# EAGLE board orion (EAGLE 7.7.0)
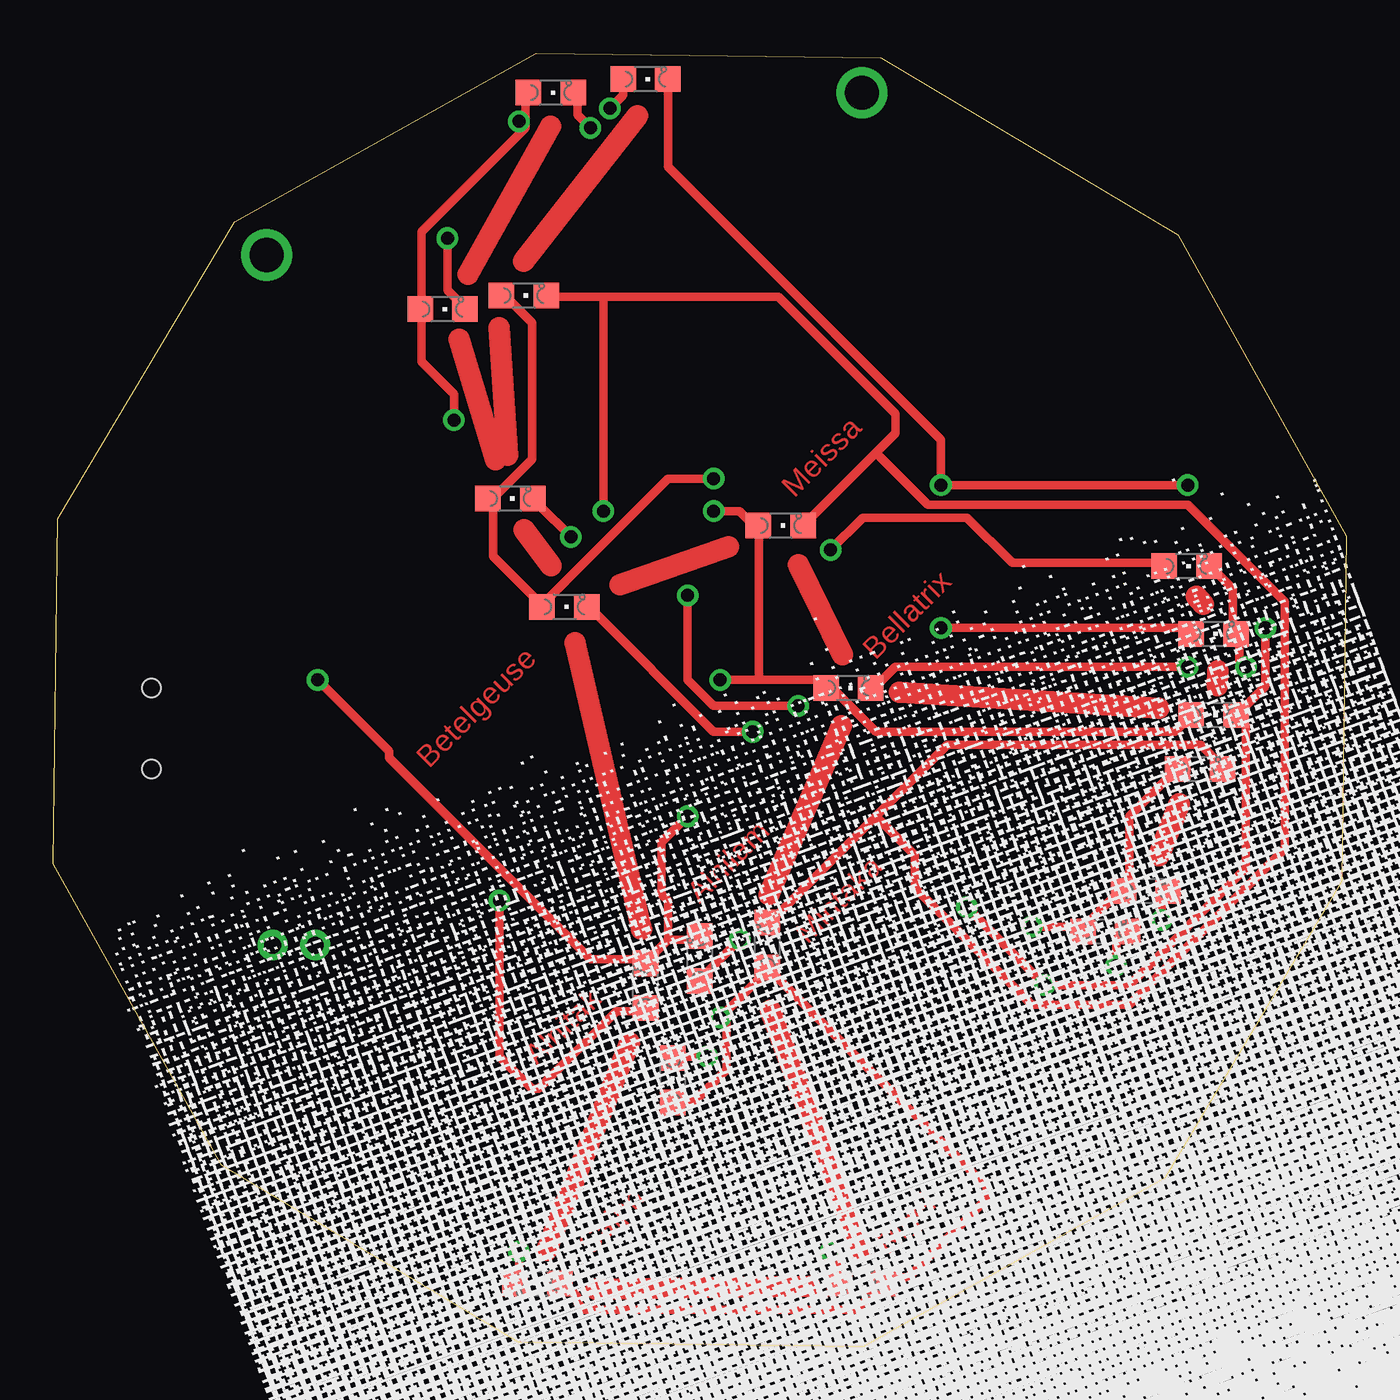
[diagram p0: board, top side]
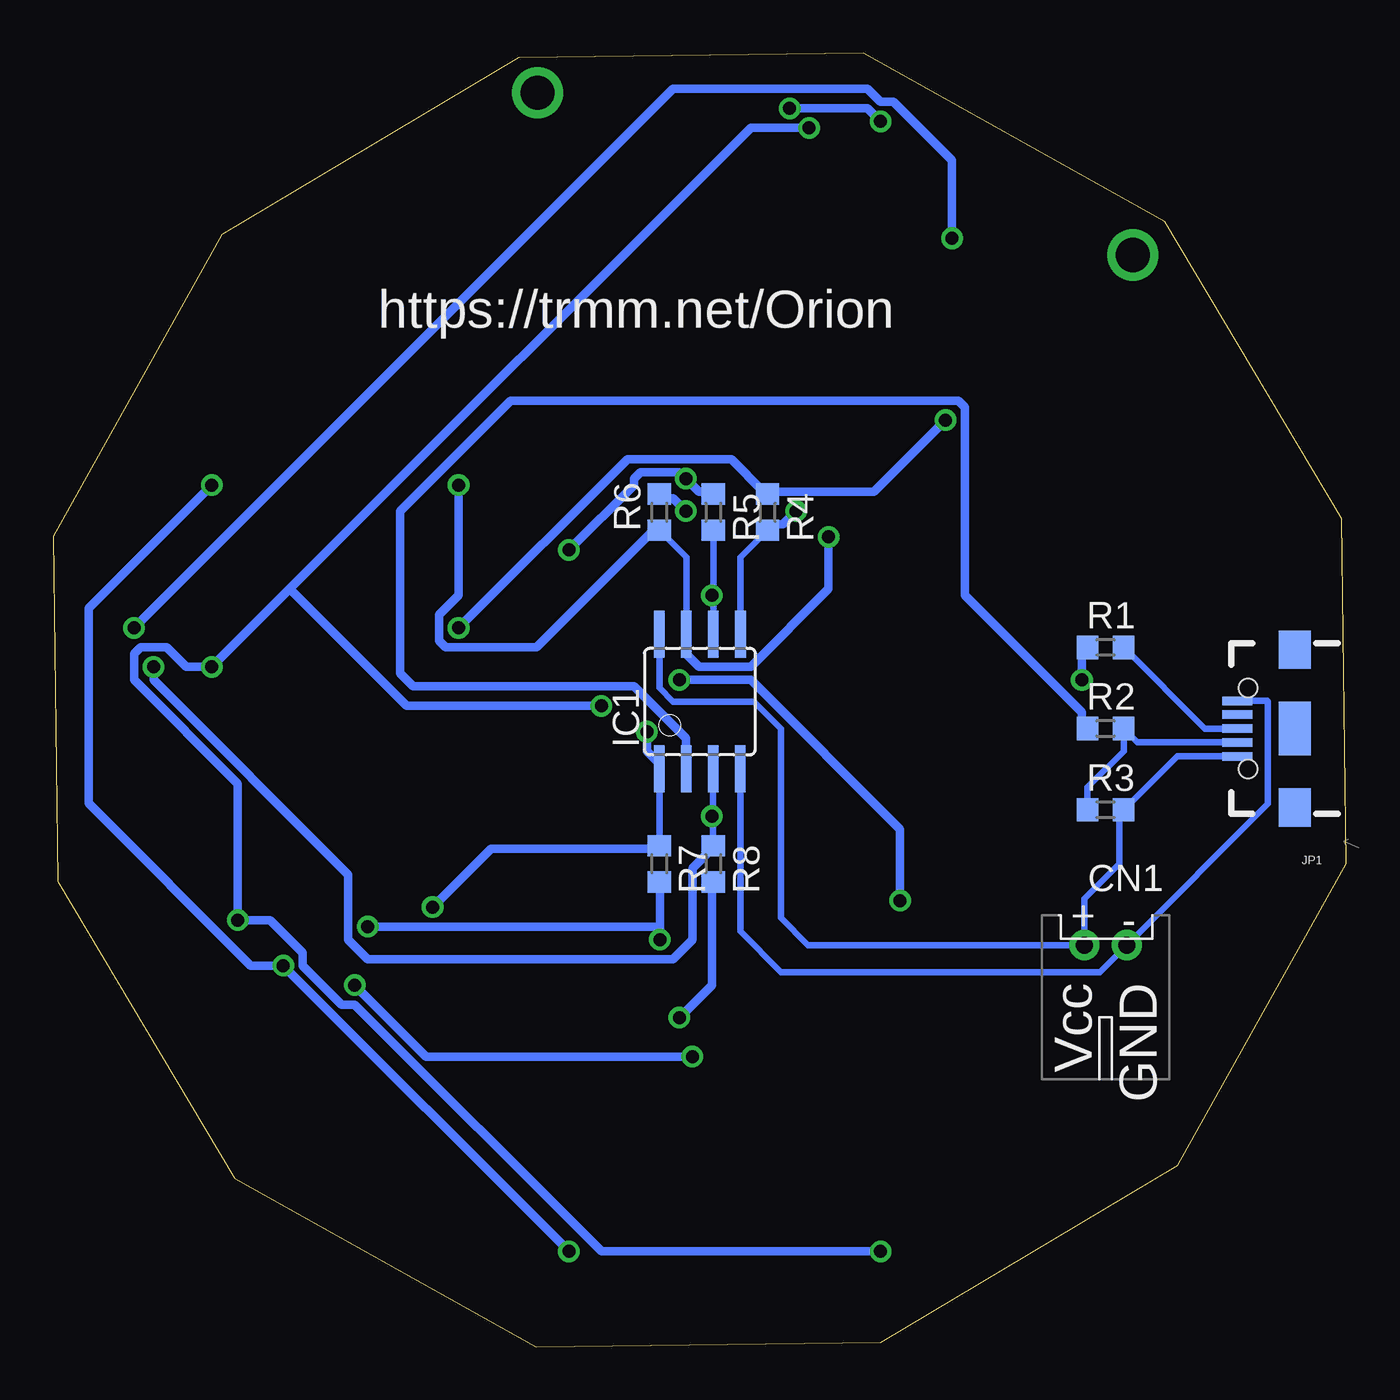
[diagram p1: board, bottom side, seen from below]

Size 60.71 x 60.71 mm. Coordinates in mm from the lower left corner, seen from the top.
Outline: 60.49,21.84 52.19,7.91 38.04,0 21.84,0.22 7.91,8.52 0,22.66 0.22,38.87 8.52,52.8 22.66,60.71 38.87,60.49 52.8,52.19 60.71,38.04 60.49,21.84
Copper layers (1*16): Top 0.035mm / dielectric 1.5mm / Bottom 0.035mm
Design rules "default": minimum track width 10mil, minimum drill 24mil, track to track 8mil, track to pad 8mil, pad to pad 8mil, via to via 8mil, smd to smd 8mil, copper to edge 40mil, drill to drill 8mil, minimum pad ring 10mil, minimum via ring 8mil, stop-mask expansion 4mil, vias tented up to drill 0mil, thermal gap 10mil
Net classes: 0 default: width 0.406 mm

## Footprints (pad centres in the part's own frame; a part is rotated, then mirrored left to right if it is on the bottom)
JST-PH-2-THM-RA = drill 0.8 pad 1.422: 1 1,0; 2 -1,0
CHIPLED_0805 = smd 1.2 x 1.2: A 0,-1.05; C 0,1.05
SOIC8 = smd 0.5 x 2.2: 1 -1.905,-3.154; 2 -0.645,-3.154; 3 0.625,-3.154; 4 1.895,-3.154; 5 1.905,3.154; 6 0.635,3.154; 7 -0.635,3.154; 8 -1.905,3.154
USB-B-MICRO-SMD_V03 = smd 1.4 x 0.4: D+1 2.7,0; D-1 2.7,0.65; GND1 2.7,-1.3; ID1 2.7,-0.65; VBUS1 2.7,1.3 | smd 1.5 x 1.8: SHIELD1 0,3.7; SHIELD2 0,-3.7 | smd 1.5 x 2.5: SHIELD3 0,0 | hole 0.85: 2.2,1.9; 2.2,-1.9
R0603 = smd 1 x 1.1: 1 -0.85,0; 2 0.85,0

## Placement (x,y rotation side)
CN1  [JST-PH-2-THM-RA]  11.3,18.85 180 bottom
D0  [CHIPLED_0805]  23.36,58.86 270 top
D1  [CHIPLED_0805]  27.81,59.49 270 top
D2  [CHIPLED_0805]  18.28,48.7 270 top
D3  [CHIPLED_0805]  22.09,49.33 270 top
D4  [CHIPLED_0805]  21.46,39.81 270 top
D5  [CHIPLED_0805]  24,34.73 270 top
D6  [CHIPLED_0805]  34.16,38.54 270 top
D7  [CHIPLED_0805]  37.33,30.92 270 top
D8  [CHIPLED_0805]  54.48,29.65 270 top
D9  [CHIPLED_0805]  53.84,27.11 270 top
D10  [CHIPLED_0805]  51.3,21.39 270 top
D11  [CHIPLED_0805]  49.4,19.49 270 top
D12  [CHIPLED_0805]  54.48,33.46 270 top
D13  [CHIPLED_0805]  53.21,36.63 270 top
D14  [CHIPLED_0805]  27.81,16.95 0 top
D15  [CHIPLED_0805]  30.35,18.22 0 top
D16  [CHIPLED_0805]  33.52,18.85 0 top
D17  [CHIPLED_0805]  22.73,2.98 90 top
D18  [CHIPLED_0805]  37.97,2.98 90 top
D19  [CHIPLED_0805]  29.08,12.5 0 top
IC1  TINY22S  [SOIC8]  30.35,30.28 0 bottom
JP1  USB_MICROB_PLUGCONN-11752  [USB-B-MICRO-SMD_V03]  2.41,29.01 180 bottom
R1  68  [R0603]  11.3,32.82 0 bottom
R2  68  [R0603]  11.3,29.01 0 bottom
R3  1.0k  [R0603]  11.3,25.2 0 bottom
R4  [R0603]  27.17,39.17 270 bottom
R5  [R0603]  29.71,39.17 270 bottom
R6  [R0603]  32.25,39.17 90 bottom
R7  [R0603]  32.25,22.66 270 bottom
R8  [R0603]  29.71,22.66 270 bottom

## Library data of the parts
CN1 = adafruit
D0 D1-D19 = led
IC1 = atmel; OC_FARNELL: unknown; OC_NEWARK: unknown
JP1 = SparkFun-Connectors; PROD_ID: CONN-11752
R1-R8 = resistor

## Nets
B0: D3.C D6.C D9.C D16.C IC1.5 R4.2
B1: D0.C D7.C D10.C D17.C IC1.6 R5.2
B2: D1.C D4.C D11.C D18.C IC1.7 R6.1
B3: D2.C D5.C D8.C D19.C IC1.1 R7.1
B4: D12.C D13.C D14.C D15.C IC1.3 R1.1 R8.1
GND: CN1.2 IC1.4 JP1.GND1
N$1: JP1.D+1 R1.2
N$2: JP1.D-1 R2.2 R3.1
N$4: IC1.2 R2.1
VBUS: CN1.1 IC1.8 JP1.VBUS1 R3.2
Y0: D0.A D1.A D2.A D12.A R4.1
Y1: D3.A D4.A D5.A D13.A R5.1
Y2: D6.A D7.A D8.A D14.A R6.2
Y3: D9.A D10.A D11.A D15.A R7.2
Y4: D16.A D17.A D18.A D19.A R8.2

## Tracks (layer width: path | path; a pad name or v marks a point on that pad's centre or on a via)
B0  (via drill 0.61)
  Top 0.406: 25.83,49.28 34.06,49.28 39.54,43.8 39.54,42.88 38.63,41.97 | 25.83,49.28 23.39,49.28 D3.C | 38.63,41.97 35.28,38.61 D6.C | 25.83,49.28 v25.83,39.22 | 38.63,24.9 41.98,28.25 53.87,28.25 54.78,27.34 D9.C | 38.63,24.9 33.75,20.02 D16.C | 38.63,41.97 41.07,39.53 53.26,39.53 57.83,34.96 57.83,23.37 50.52,16.06 45.94,16.06 40.46,21.54 40.46,23.07 38.63,24.9
  Bottom 0.305: IC1.5 28.44,37.05 R4.2
  Bottom 0.406: v25.83,39.22 26.44,38.61 27.05,38.61 R4.2
B1  (via drill 0.61)
  Top 0.406: v21.86,4.48 21.86,3.26 D17.C | v52.04,20.02 52.04,20.94 52.34,21.24 D10.C | v53.26,31.91 39.54,31.91 38.63,30.99 D7.C | v25.22,57.21 24.61,57.82 24.61,58.73 D0.C | v29.79,35.26 29.79,31.3 31.01,30.08 v34.97,30.08
  Bottom 0.305: IC1.6 29.71,35.26 R5.2
  Bottom 0.406: v21.86,4.48 34.97,4.48 46.55,16.06 47.16,16.06 48.99,17.89 48.99,18.5 50.52,20.02 v52.04,20.02 52.04,26.42 56.92,31.3 56.92,32.52 56.61,32.82 55.39,32.82 54.48,31.91 v53.26,31.91 49.6,35.57 | v25.22,57.21 27.96,57.21 49.6,35.57 | v34.97,30.08 44.11,30.08 49.6,35.57 | v29.79,35.26 29.71,35.26
B2  (via drill 0.61)
  Top 0.406: v36.49,4.48 36.8,4.17 36.8,3.26 D18.C | v49.91,17.89 49.91,19.11 50.21,19.41 D11.C | v24.3,38 22.78,39.53 D4.C | D1.C 28.87,59.34 28.87,55.38 41.68,42.58 v41.68,40.44 v53.26,40.44
  Bottom 0.305: IC1.7 30.98,37.05 R6.1
  Bottom 0.406: v36.49,4.48 v49.91,17.89 51.43,17.89 59.05,25.51 59.05,34.65 v53.26,40.44 | v24.3,38 24.3,35.57 27.96,31.91 30.4,31.91 31.01,32.52 31.01,33.43 IC1.7 | v41.68,40.44 41.68,35.26 42.59,34.35 42.59,33.13 42.29,32.82 38.02,32.82 32.53,38.31 R6.1
B3  (via drill 0.61)
  Top 0.406: v32.84,28.86 31.01,28.86 25.22,34.65 D5.C | v30.7,13.62 29.18,13.62 D19.C | v18.51,52.02 18.51,49.59 19.12,48.98 D2.C | v56.92,33.74 56.92,30.99 55.7,29.77 D8.C 55.7,29.47 56,29.16 56,22.46 50.52,16.97 v46.55,16.97 v42.9,20.63
  Bottom 0.305: IC1.1 R7.1
  Bottom 0.406: v32.84,28.86 32.84,27.95 32.23,27.34 IC1.1 | v30.7,13.62 43.2,13.62 v46.55,16.97 | v18.51,52.02 18.51,55.68 21.25,58.43 21.86,58.43 22.47,59.04 31.62,59.04 v56.92,33.74 | v42.9,20.63 40.15,23.37 32.53,23.37 R7.1
B4  (via drill 0.61)
  Top 0.406: v12.42,31.3 15.77,27.95 15.77,27.64 25.22,18.19 27.66,18.19 D14.C 27.96,18.19 28.87,19.11 | 28.87,19.11 30.09,19.11 D15.C | D13.C 54.48,36.48 55.39,35.57 55.39,33.74 D12.C 55.7,33.43 55.7,32.21 v56,31.91 | 28.87,19.11 28.87,20.94 28.57,21.24 28.57,23.68 v29.79,24.9
  Bottom 0.305: IC1.3 29.72,24.9 29.72,23.52 R8.1
  Bottom 0.406: v12.42,31.3 12.42,32.82 R1.1 | v56,31.91 56,31.3 46.86,22.15 46.86,19.11 45.94,18.19 31.62,18.19 30.7,19.11 30.7,22.46 29.79,23.37 R8.1 | v29.79,24.9 29.72,24.9
GND
  Bottom 0.305: JP1.GND1 3.71,30.31 3.68,30.28 3.68,25.47 CN1.2 11.57,17.58 26.54,17.58 28.45,19.5 IC1.4
N$1
  Bottom 0.305: JP1.D+1 6.64,29.01 R1.2
N$2
  Bottom 0.305: JP1.D-1 9.8,28.36 R2.2 10.45,27.96 12.15,26.26 R3.1
N$3
  Top 1.016: 23.35,57.28 19.48,50.33
N$4
  Bottom 0.406: R2.1 12.42,29.16 12.42,29.77 17.9,35.26 17.9,44.1 18.21,44.4 39.24,44.4 44.42,39.22 44.42,31.6 43.81,30.99 33.45,30.99 31.01,28.56 31.01,27.34 IC1.2
N$5
  Top 1.016: 27.42,57.77 22.08,50.96
N$7
  Top 1.016: 20.93,47.82 21.34,41.85
N$8
  Top 1.016: 19.05,47.28 20.78,41.63
N$9
  Top 1.016: 22.12,38.34 23.38,36.64
N$10
  Top 1.016: 27.61,19.6 24.49,33.04
N$11
  Top 1.016: 26.62,35.77 31.7,37.54
N$12
  Top 1.016: 34.98,36.69 37.05,32.48
N$13
  Top 1.016: 37.01,29.15 33.61,21.22
N$14
  Top 1.016: 27.06,14.26 23.17,4.53
N$15
  Top 1.016: 37.9,4.48 33.66,15.8
N$16
  Top 1.016: 54.64,31.02 54.68,31.73
N$17
  Top 1.016: 54,34.85 53.66,35.23
N$18
  Top 1.016: 52.87,25.49 51.91,23.05
N$19
  Top 1.016: 39.73,30.73 51.92,29.97
N$20
  Top 1.016: 35.52,2.83 25.48,2.7
N$21  (via drill 1.6)
  other vias: 10.03,51.24
N$22  (via drill 1.6)
  other vias: 37.97,58.86
VBUS
  Bottom 0.305: JP1.VBUS1 7.94,27.71 R3.2 10.66,24.99 10.66,22.66 12.3,21.03 CN1.1 25.27,18.85 26.54,20.12 26.54,29.01 27.81,30.28 31.62,30.28 32.25,30.92 IC1.8
Y0  (via drill 0.61)
  Top 0.406: v18.82,43.49 18.82,44.71 17.29,46.23 17.29,48.67 D2.A 17.29,48.98 17.29,52.33 22.17,57.21 22.17,57.51 | 22.17,57.51 22.17,58.73 D0.A | v41.68,33.74 53.26,33.74 D12.A | v26.13,58.12 26.74,58.73 26.74,59.34 D1.A | 22.17,57.51 v21.86,57.51
  Bottom 0.406: v18.82,43.49 22.17,40.14 27.05,40.14 R4.1 27.35,40.14 28.87,41.66 33.75,41.66 v41.68,33.74 | v26.13,58.12 22.47,58.12 v21.86,57.51
Y1  (via drill 0.61)
  Top 0.406: v31.01,40.75 28.87,40.75 23.08,34.96 D5.A 22.78,34.96 20.64,37.09 20.64,39.53 D4.A 20.64,39.83 22.47,41.66 22.47,48.06 21.25,49.28 D3.A | v36.49,37.39 38.02,38.92 42.9,38.92 45.03,36.78 52.04,36.78 D13.A
  Bottom 0.406: R5.1 29.79,40.14 30.4,40.14 v31.01,40.75 31.31,41.05 33.14,41.05 33.45,40.75 33.45,40.44 v36.49,37.39
Y2  (via drill 0.61)
  Top 0.406: v31.01,39.22 32.23,39.22 32.84,38.61 D6.A 33.14,38.31 33.14,31.3 | D8.A 53.26,29.47 52.65,28.86 38.63,28.86 36.49,30.99 D7.A 36.19,30.99 35.88,31.3 33.14,31.3 | v20.95,20.94 20.95,13.62 22.47,12.1 22.78,12.1 26.44,15.75 27.66,15.75 D14.A | 33.14,31.3 v31.31,31.3
  Bottom 0.406: v31.01,39.22 31.62,39.83 32.23,39.83 R6.2 | v20.95,20.94 20.95,24.29 27.96,31.3 v31.31,31.3
Y3  (via drill 0.61)
  Top 0.406: v32.23,19.11 30.4,17.28 D15.A | D9.A 52.65,27.03 50.52,24.9 50.52,21.54 D10.A 50.21,21.54 48.38,19.72 D11.A 48.08,19.72 v45.94,19.72
  Bottom 0.406: v32.23,19.11 32.23,19.72 | 32.23,19.72 32.23,21.54 R7.2 | v45.94,19.72 32.23,19.72
Y4  (via drill 0.61)
  Top 0.406: 31.62,15.75 33.45,17.58 D16.A 33.75,17.58 43.81,7.52 43.81,6.91 40.15,3.26 39.24,3.26 D18.A 38.93,2.95 37.71,1.73 24.91,1.73 24.61,2.04 24.61,2.34 24,2.95 D17.A | 31.62,15.75 31.62,13.01 30.09,11.49 29.18,11.49 D19.A | 31.62,15.75 v31.31,15.45
  Bottom 0.406: v31.31,15.45 29.79,16.97 29.79,21.54 R8.2

## Text on the board
Top: Meissa | Bellatrix | Betelgeuse | Alnilam | Mintaka | Alnitak | Saiph | Rigel
tNames: /home/hudson/nycr/orion/gradient3.bmp
bNames: https://trmm.net/Orion | GND | Vcc
tStop: Meissa | Bellatrix | Betelgeuse | Alnilam | Mintaka | Alnitak | Saiph | Rigel